# EAGLE board SIPO SHIFT REGISTER (EAGLE 9.7.0)

Size 201.04 x 76.53 mm. Coordinates in mm from the lower left corner, seen from the top.
Outline: 0,0 201.04,0 201.04,76.53 0,76.53 0,0
Copper layers (1*16): Top 0.035mm / dielectric 1.5mm / Bottom 0.035mm
Design rules "default": minimum track width 6mil, minimum drill 0.35mm, track to track 6mil, track to pad 6mil, pad to pad 6mil, via to via 6mil, smd to smd 6mil, copper to edge 40mil, drill to drill 6mil, minimum pad ring 10mil, minimum via ring 8mil, stop-mask expansion 4mil, vias tented up to drill 0mil, thermal gap 10mil

## Footprints (pad centres in the part's own frame; a part is rotated, then mirrored left to right if it is on the bottom)
LEDRD254W60D565H860B = drill 0.981 pad 1.581: 1 -1.27,0; 2 1.27,0
BATTERY-GENERIC = drill 1.118 pad 3.15 octagon: + 2.54,0; - -2.54,0
RESAD1016W63L850D250B = drill 0.83 pad 1.43: 1 -5.08,0; 2 5.08,0
78F01T = drill 0.8: 1 -1.27,-3.81; 2 1.27,-3.81; 3 1.27,3.81; 4 -1.27,3.81
DIP762W53P254L1969H508Q14B = drill 0.743 pad 1.343: 1 -3.81,7.62; 2 -3.81,5.08; 3 -3.81,2.54; 4 -3.81,0; 5 -3.81,-2.54; 6 -3.81,-5.08; 7 -3.81,-7.62; 8 3.81,-7.62; 9 3.81,-5.08; 10 3.81,-2.54; 11 3.81,0; 12 3.81,2.54; 13 3.81,5.08; 14 3.81,7.62

## Placement (x,y rotation side)
D1  RED  [LEDRD254W60D565H860B]  172.12,53.61 180 top
D2  RED  [LEDRD254W60D565H860B]  179.74,53.61 180 top
D3  RED  [LEDRD254W60D565H860B]  187.36,53.61 180 top
D4  RED  [LEDRD254W60D565H860B]  194.98,53.61 180 top
FUNC1  FUNCTION-GENERATOR  [BATTERY-GENERIC]  8.26,8.26 180 top
P1  BATTERYGENERIC  [BATTERY-GENERIC]  17.31,68.28 180 top
R1  1k  [RESAD1016W63L850D250B]  170.85,66.31 90 top
R2  1k  [RESAD1016W63L850D250B]  178.47,66.31 90 top
R3  1k  [RESAD1016W63L850D250B]  186.09,66.31 90 top
R4  1k  [RESAD1016W63L850D250B]  193.71,66.31 90 top
SW1  DPST78F01T  [78F01T]  65.44,47.26 0 top
SW2  DPST78F01T  [78F01T]  75.6,47.26 0 top
U1  74HC74_PDIP  [DIP762W53P254L1969H508Q14B]  107.35,47.26 90 top
U2  74HC74_PDIP  [DIP762W53P254L1969H508Q14B]  135.29,47.26 90 top

## Library data of the parts
D1-D4 = Tinkercad; CATEGORY: Opto-Electronic; SUB-CATEGORY: LED; VALUE: LED_RED
FUNC1 P1 R1-R4 SW1 SW2 U1 U2 = Tinkercad

## Nets
D1_C: D1.2 R1.1
D2_C: D2.2 R2.1
D3_C: D3.2 R3.1
D4_C: D4.2 R4.1
FUNC1+: FUNC1.+ SW1.1
P1+: FUNC1.- P1.+ SW2.1 SW2.4 U1.1 U1.2 U1.4 U1.7 U1.10 U1.13 U1.14 U2.1 U2.4 U2.7 U2.10 U2.13 U2.14
P1-: P1.- R1.2 R2.2 R3.2 R4.2
U1_CLK1: SW1.4 U1.3 U2.11
U1_D2: D1.1 U1.5 U1.12
U2_1Q: D3.1 U2.5
U2_2Q: D4.1 U2.9
U2_D1: D2.1 U1.9 U2.2

## Tracks (layer width: path | path; a pad name or v marks a point on that pad's centre or on a via)
D1_C  (1 unrouted)
D2_C  (1 unrouted)
D3_C  (1 unrouted)
D4_C  (1 unrouted)
FUNC1+  (1 unrouted)
P1+  (16 unrouted)
P1-  (4 unrouted)
U1_CLK1  (2 unrouted)
U1_D2  (2 unrouted)
U2_1Q  (1 unrouted)
U2_2Q  (1 unrouted)
U2_D1  (2 unrouted)